# Altium PCB Energy_Monitor.PcbDoc
Units mil, origin at the board's own origin, x right, y up, seen from the top; angles counter-clockwise.
Board outline 4800 x 3400 mil, 2 copper layers (Top Layer, Bottom Layer); 83 components, 55 nets, 258 pads, 67 vias.
Unrouted connection lines stored in the file: 18.
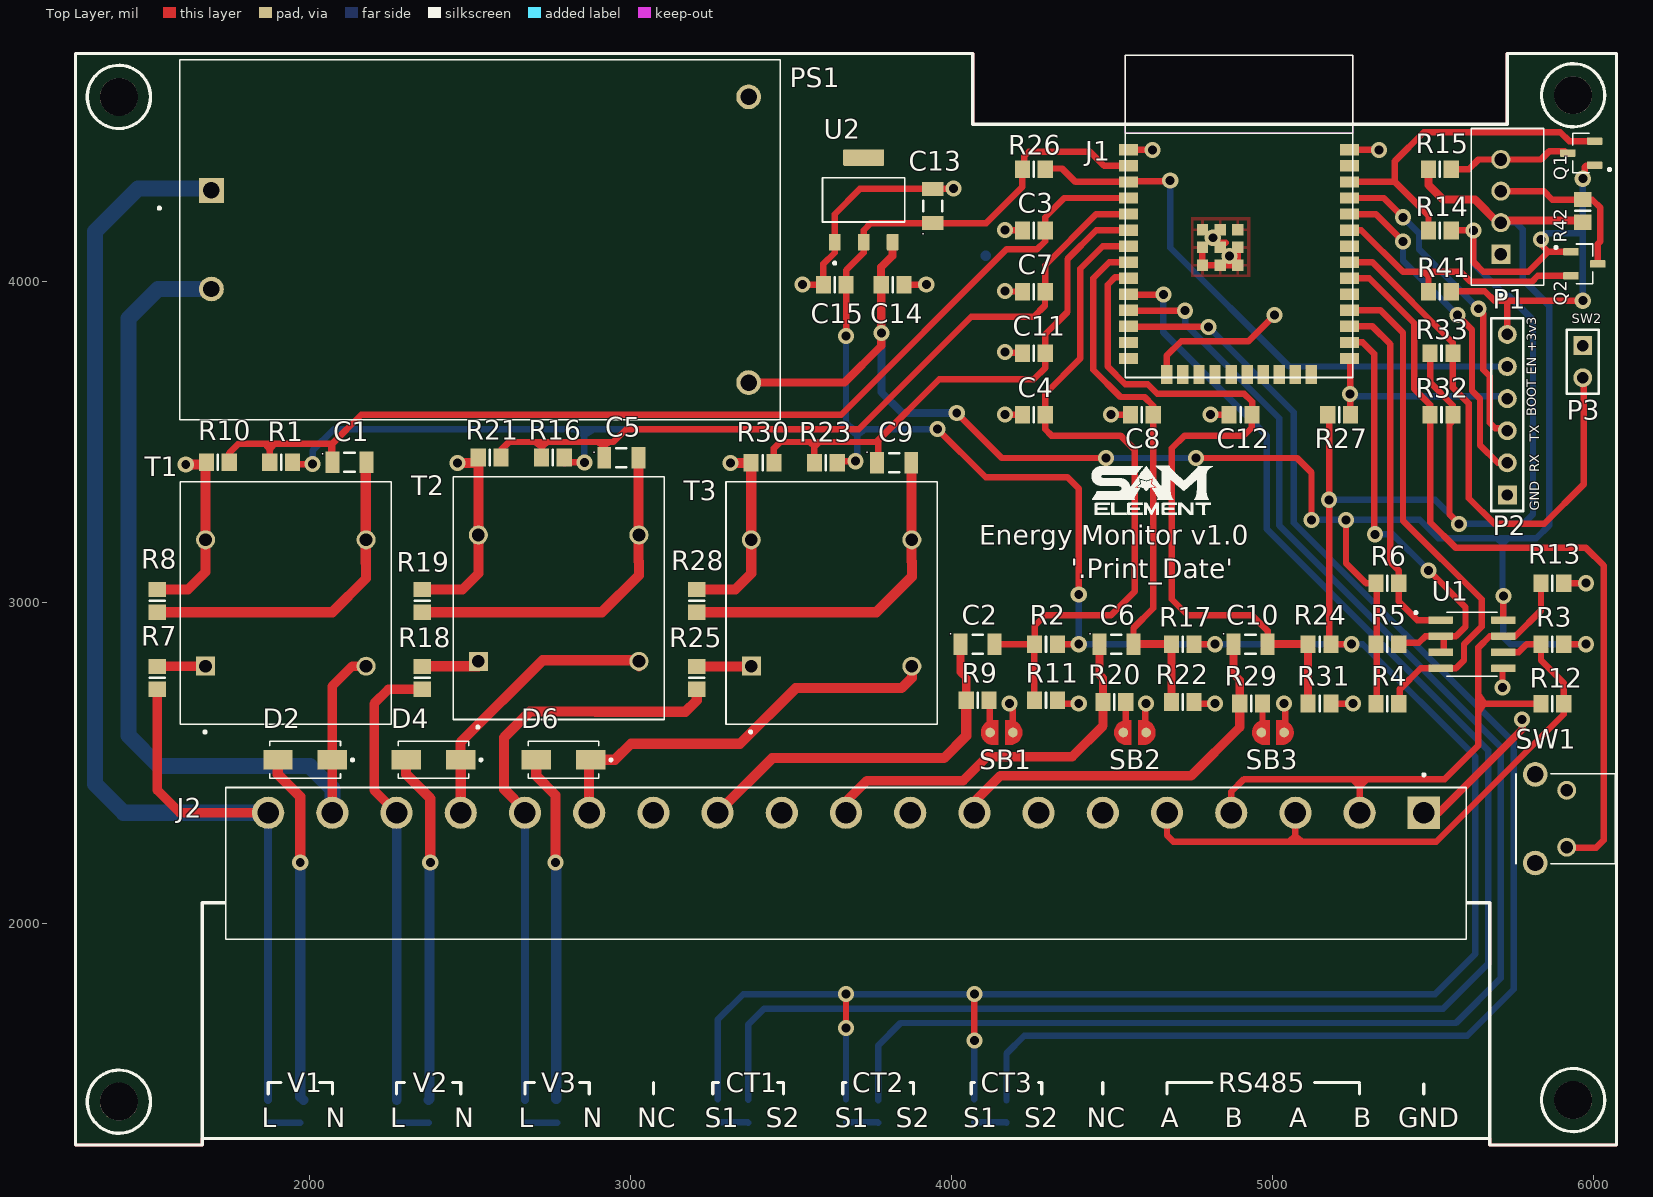
[diagram p0: Top Layer view]
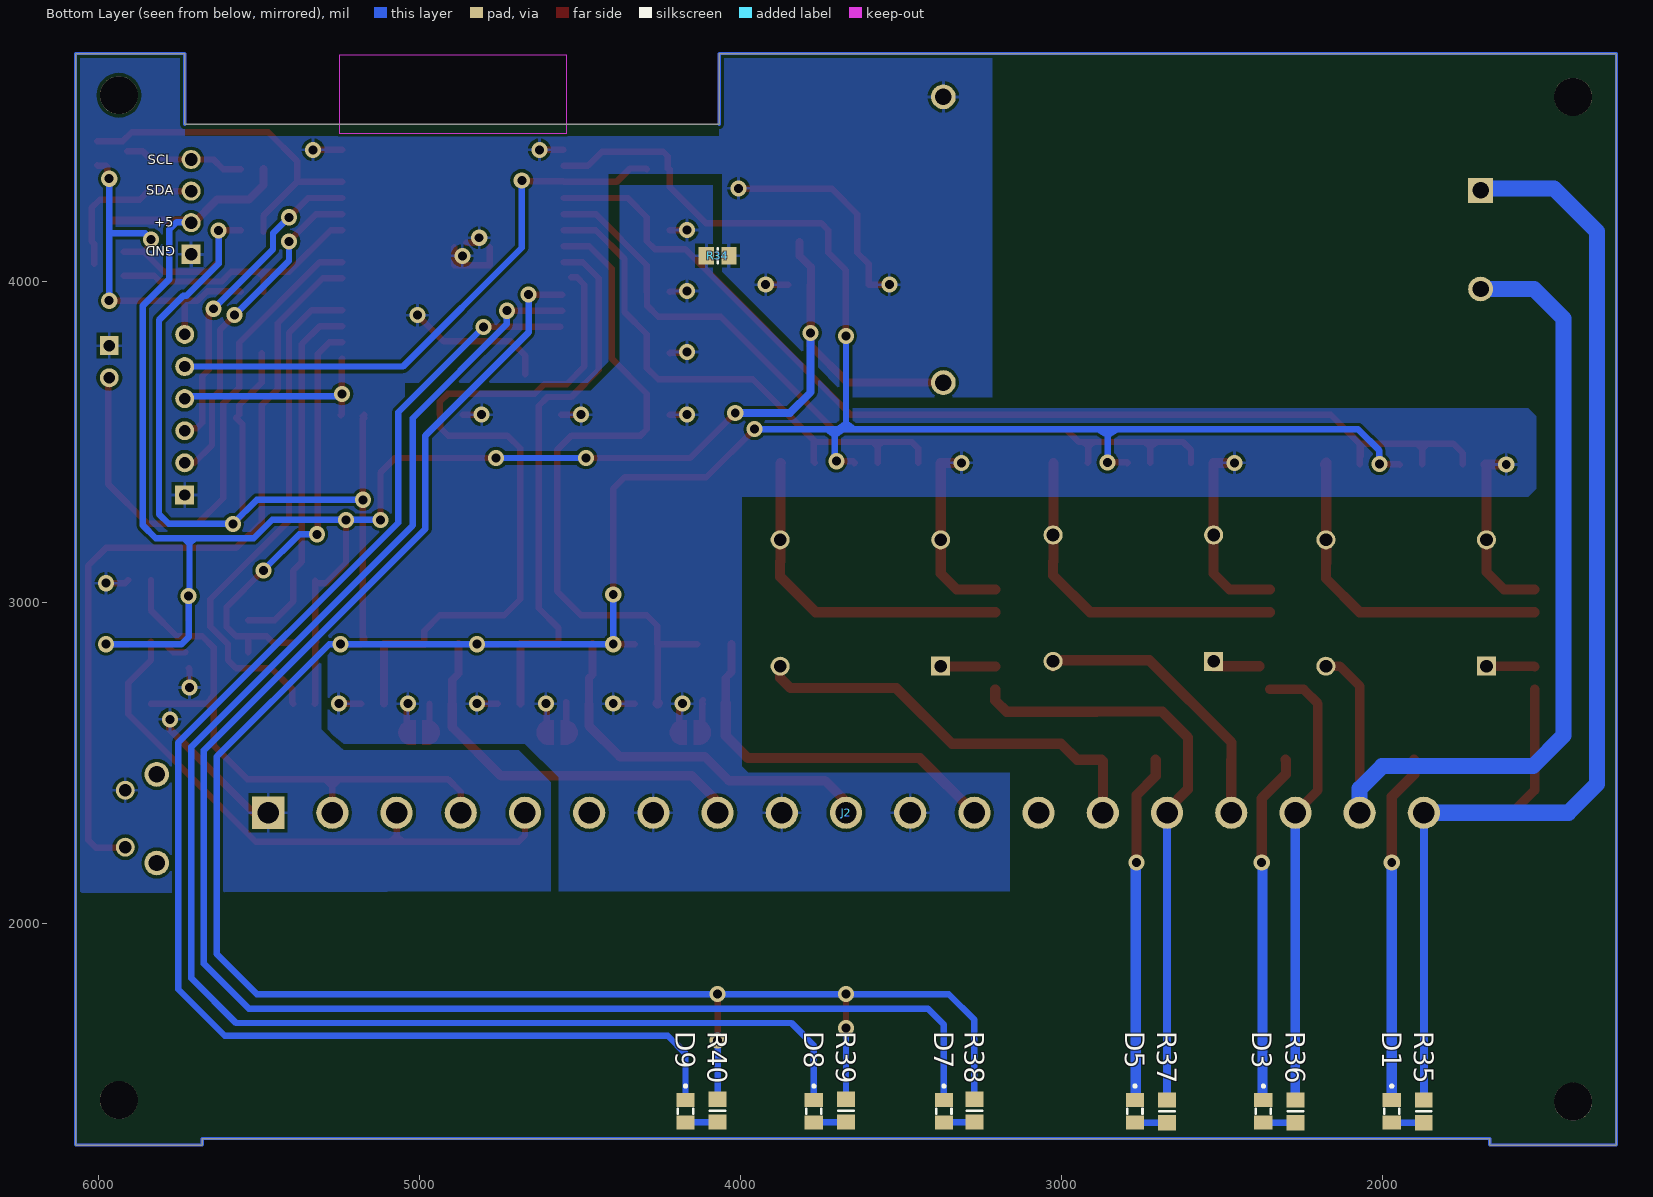
[diagram p1: Bottom Layer view, seen from below]

## Layer stack, top to bottom
Top Solder: solder mask 0.4, Solder Resist, Dk 3.5
Top Layer: signal copper 1.4
Dielectric 1: dielectric 12.6, FR-4, Dk 4.8
Bottom Layer: signal copper 1.4
Bottom Solder: solder mask 0.4, Solder Resist, Dk 3.5

## Board outline
1665,1310 1665,1330 5675,1330 5675,1310 6070,1310 6070,4710 5730,4710 5730,4490 4065,4490 4065,4710 1270,4710 1270,1310

## Design rules (kind name [scope] priority, off if disabled: settings)
Clearance [All] p1: gap=10 ignorepadtopadclearanceinfootprint=FALSE except(0: Arc-Hole Track-Hole SMDPad-Hole THPad-Hole Via-Hole Fill-Hole Poly-Hole Region-Hole Text-Hole)
PolygonConnect [All] p1: connectstyle=Relief reliefconductorwidth=10 reliefentries=4 polygonreliefangle="90 Angle" airgapwidth=10
RoutingVias [All] p1: holewidth=28 width=50 viastyle="Through Hole" minholewidth=28 minwidth=50 maxholewidth=28 maxwidth=50
SolderMaskExpansion [All] p1: expansion=4
Width [All] p1: maxlimit=100 minlimit=5 preferedwidth=23.62 minimp=50.000000 maximp=50.000000 favimp=50.000000
30 further rules are at their usual default settings.

## Components (designator, comment, footprint, x,y, rotation, side; value= is the part's Value field where it differs from the comment)
C1 "C Tantalum 10u" C1206 2123.31,3436.52 r0 top value=10uF
C2 "C Tantalum 10u" C1206 4080,2870 r180 top value=10uF
C3 "C 100n" 6-0805_N 4255,4158.75 r0 top value=100n
C4 "C 100n" 6-0805_N 4255,3585 r0 top value=100n
C5 "C Tantalum 10u" C1206 2970,3451.52 r0 top value=10uF
C6 "C Tantalum 10u" C1206 4512.3,2870 r180 top value=10uF
C7 "C 100n" 6-0805_N 4255,3967.5 r0 top value=100n
C8 "C 100n" 6-0805_N 4591.79,3585 r0 top value=100n
C9 "C Tantalum 10u" C1206 3820,3435 r0 top value=10uF
C10 "C Tantalum 10u" C1206 4930,2870 r180 top value=10uF
C11 "C 100n" 6-0805_N 4255,3776.25 r0 top value=100n
C12 "C 100n" 6-0805_N 4898.94,3585 r0 top value=100n
C13 "C Tantalum 10u" C1206 3940,4235 r90 top value=10uF
C14 "C 100n" 6-0805_N 3815,3990 r180 top value=100n
C15 "C 100n" 6-0805_N 3635,3990 r0 top value=100n
D1 "LED 0805" LEDC2012X70N 1970,1415 r270 bottom
D2 "1N4007" DIOM5227X270N 1985,2510 r180 top
D3 "LED 0805" LEDC2012X70N 2370,1415 r270 bottom
D4 "1N4007" DIOM5227X270N 2385,2510 r180 top
D5 "LED 0805" LEDC2012X70N 2770,1415 r270 bottom
D6 "1N4007" DIOM5227X270N 2790,2510 r180 top
D7 "LED 0805" LEDC2012X70N 3365,1415 r270 bottom
D8 "LED 0805" LEDC2012X70N 3770,1415 r270 bottom
D9 "LED 0805" LEDC2012X70N 4170,1415 r270 bottom
J1 "ESP32-WROOM-32E" ESP32-WROOM-32E 4894.49,4085 r0 top
J2 "Terminal Block Right angle 19Pin" CUI_TBP01R1-508-19BE 5470,2345 r180 bottom
P1 "Header 4" JST_B4B-XH-A(LF)(SN) 5730.67,4232.36 r270 top
P2 "Header 6" HDR1X6 5730,3335 r90 top
P3 "Header 2" HDR1X2 5965,3800 r270 top
PS1 "HLK-10M05" CONV_HLK-10M05 2530,4130 r0 top
Q1 "BSS138" SOT95P240X111-3N 5960,4400 r180 top
Q2 "BSS138" SOT95P240X111-3N 5970,4055 r0 top
R1 "R 200K" 6-0805_N 1910.43,3436.52 r0 top value=200K
R2 "R 200K" 6-0805_N 4293,2870 r0 top value=200K
R3 "R 10K" 6-0805_N 5870.43,2870 r0 top value=10K
R4 "R 10K" 6-0805_N 5356.25,2685 r180 top value=10K
R5 "R 10K" 6-0805_N 5356.25,2870 r180 top value=10K
R6 "R 10K" 6-0805_N 5356.25,3060 r180 top value=10K
R7 "R 200K" 6-0805_N 1525,2765 r90 top value=200K
R8 "R 500" 6-0805_N 1525,3005 r270 top value=500
R9 "R 22" 6-0805_N 4080,2695.13 r180 top value=22
R10 "R 200K" 6-0805_N 1713.31,3436.52 r0 top value=200K
R11 "R 200K" 6-0805_N 4293,2695.13 r180 top value=200K
R12 "R 120" 6-0805_N 5870.43,2685 r0 top value=120
R13 "R 10K" 6-0805_N 5870.43,3060 r180 top value=10K
R14 "R 10K" 6-0805_N 5520,4158.75 r0 top value=10K
R15 "R 10K" 6-0805_N 5520,4350 r180 top value=10K
R16 "R 200K" 6-0805_N 2757.13,3451.52 r0 top value=200K
R17 "R 200K" 6-0805_N 4719,2870 r0 top value=200K
R18 "R 200K" 6-0805_N 2350,2765 r90 top value=200K
R19 "R 500" 6-0805_N 2350,3005 r270 top value=500
R20 "R 22" 6-0805_N 4506,2690.13 r180 top value=22
R21 "R 200K" 6-0805_N 2560,3451.52 r0 top value=200K
R22 "R 200K" 6-0805_N 4719,2690.13 r180 top value=200K
R23 "R 200K" 6-0805_N 3607.13,3435 r0 top value=200K
R24 "R 200K" 6-0805_N 5145,2870 r0 top value=200K
R25 "R 200K" 6-0805_N 3205,2765 r90 top value=200K
R26 "R 10K" 6-0805_N 4255,4350 r180 top value=10K
R27 "R 10K" 6-0805_N 5206.09,3585 r180 top value=10K
R28 "R 500" 6-0805_N 3205,3005 r270 top value=500
R29 "R 22" 6-0805_N 4932,2685.13 r180 top value=22
R30 "R 200K" 6-0805_N 3410,3435 r0 top value=200K
R31 "R 200K" 6-0805_N 5145,2685.13 r180 top value=200K
R32 "R 10K" 6-0805_N 5525,3585 r0 top value=10K
R33 "R 10K" 6-0805_N 5525,3776.25 r180 top value=10K
R34 "R 0" 6-0805_N 4070,4080 r0 bottom value=0
R35 "R 200K" 6-0805_N 1870,1415 r270 bottom value=200K
R36 "R 200K" 6-0805_N 2270,1415 r270 bottom value=200K
R37 "R 200K" 6-0805_N 2670,1415 r270 bottom value=200K
R38 "R 500" 6-0805_N 3270,1416.97 r270 bottom value=500
R39 "R 500" 6-0805_N 3670,1416.97 r270 bottom value=500
R40 "R 500" 6-0805_N 4070,1416.97 r270 bottom value=500
R41 "R 10K" 6-0805_N 5520,3967.5 r0 top value=10K
R42 "R 10K" 6-0805_N 5965,4220 r270 top value=10K
SB1 "solder Bridge" "Solder Bridge"#1 4145,2595 r0 top
SB2 "solder Bridge" "Solder Bridge"#1 4560,2595 r0 top
SB3 "solder Bridge" "Solder Bridge"#2 4990,2595 r0 top
SW1 "Tactile Switch Right Angle" SW_1825027-5 5915,2326.42 r90 top
T1 "ZMPT101B" XFMR_ZMPT101B 1925,2998.36 r90 top
T2 "ZMPT101B" XFMR_ZMPT101B 2775,3013.36 r90 top
T3 "ZMPT101B" XFMR_ZMPT101B 3625,2998.36 r90 top
U1 "MAX485ESA+T" SOIC127P600X175-8N 5620,2870 r0 top
U2 "AMS1117-3.3" SOT229P700X180-4N 3725,4254.1 r90 top

## Footprints (in the part's own frame and the unit in brackets; to place one, negate y for a bottom-side part, rotate by r counter-clockwise, add the part's x,y. Pads: shape width x height; smd on the part's side, far side on the other; paste and mask are expansions set on the pad)
6-0805_N [mm] "Chip Resistor, Body 2.0x1.2mm, IPC Medium Density"
  rect 1.2x1.4 smd: 1(-0.9,0) 2(0.9,0)
  silkscreen extent 0,-0.6 0,0.6, body extent -1.07,-0.7 1.07,0.7, height 0.7
C1206 [mm] "Chip Capacitor, Body 3.2x1.6mm, IPC High Density"
  rect 1.1x1.7 smd: 1(-1.35,0) 2(1.35,0)
  silkscreen extent -0.4,-0.75 0.4,0.75, body extent -1.7,-0.9 1.7,0.9, height 1.3
CONV_HLK-10M05 [mm]
  rect 1.95x1.95 / inner round 1.95 / far side rect 1.95x1.95 hole 1.3: 1(-21.25,3.9)
  round 1.95 hole 1.3: 2(-21.25,-3.9) 3(21.25,11.3) 4(21.25,-11.3)
  silkscreen extent -25.47,-14.25 23.75,14.25, body extent -23.75,-14.25 23.75,14.25, height 22
CUI_TBP01R1-508-19BE [mm]
  rect 2.55x2.55 / inner round 2.55 / far side rect 2.55x2.55 hole 1.7: 1(0,0)
  round 2.55 hole 1.7: 2(5.08,0) 3(10.16,0) 4(15.24,0) 5(20.32,0) 6(25.4,0) 7(30.48,0) 8(35.56,0) 9(40.64,0) 10(45.72,0) 11(50.8,0) 12(55.88,0) 13(60.96,0) 14(66.04,0) 15(71.12,0) 16(76.2,0) 17(81.28,0) 18(86.36,0) 19(91.44,0)
DIOM5227X270N [mm]
  rect 2.33x1.56 smd: A(2.14,0) C(-2.14,0)
  silkscreen extent -3.85,-1.48 2.8,1.48, body extent -2.52,-1.14 2.53,1.03, height 2.45
ESP32-WROOM-32E [mm]
  rect 1.5x0.9 smd: 1(-8.75,8.255) 2(-8.75,6.985) 3(-8.75,5.715) 4(-8.75,4.445) 5(-8.75,3.175) 6(-8.75,1.905) 7(-8.75,0.635) 8(-8.75,-0.635) 9(-8.75,-1.905) 10(-8.75,-3.175) 11(-8.75,-4.445) 12(-8.75,-5.715) 13(-8.75,-6.985) 14(-8.75,-8.255) 25(8.75,-8.255) 26(8.75,-6.985) 27(8.75,-5.715) 28(8.75,-4.445) 29(8.75,-3.175) 30(8.75,-1.905) 31(8.75,-0.635) 32(8.75,0.635) 33(8.75,1.905) 34(8.75,3.175) 35(8.75,4.445) 36(8.75,5.715) 37(8.75,6.985) 38(8.75,8.255)
  rect 0.9x1.5 smd: 15(-5.715,-9.505) 16(-4.445,-9.505) 17(-3.175,-9.505) 18(-1.905,-9.505) 19(-0.635,-9.505) 20(0.635,-9.505) 21(1.905,-9.505) 22(3.175,-9.505) 23(4.445,-9.505) 24(5.715,-9.505)
  rect 0.9x0.9 smd: GND@39(-2.9,1.935) GND@40(-1.5,1.935) GND@41(-0.1,1.935) GND@42(-2.9,0.535) GND@43(-1.5,0.535) GND@44(-0.1,0.535) GND@45(-2.9,-0.865) GND@46(-1.5,-0.865) GND@47(-0.1,-0.865)
  Keep-Out Layer region: 9,9.555 -9,9.555 -9,15.745 9,15.745
  silkscreen extent -9,-9.75 9,15.75, body extent -9,-9.83 9,15.67, height 3.25
HDR1X2 [mm] "Connector; Header; 2 Position"
  rect 1.5x1.5 hole 0.9: 1(0,0)
  round 1.5 hole 0.9: 2(2.54,0)
  silkscreen extent -1.27,-1.27 3.81,1.27
HDR1X6 [mm] "Connector; Header; 6 Position"
  rect 1.5x1.5 hole 0.9: 1(0,0)
  round 1.5 hole 0.9: 2(2.54,0) 3(5.08,0) 4(7.62,0) 5(10.16,0) 6(12.7,0)
  silkscreen extent -1.27,-1.27 13.97,1.27
JST_B4B-XH-A(LF)(SN) [mm]
  rect 1.508x1.508 / inner round 1.508 / far side rect 1.508x1.508 hole 1: 1(3.75,-0.525)
  round 1.508 hole 1: 2(1.25,-0.525) 3(-1.25,-0.525) 4(-3.75,-0.525)
  silkscreen extent -6.2,-2.88 7.1,2.88, body extent -6.2,-2.88 6.2,2.88, height 7
LEDC2012X70N [mm]
  rect 1.1x1.45 smd: A(0.9,0) C(-0.9,0)
  silkscreen extent -2.1,-0.6 0.2,0.6, body extent -1,-0.62 1,0.62, height 0.7
SOIC127P600X175-8N [mm]
  rrect25% 1.97x0.59 smd: 1(-2.475,1.905) 2(-2.475,0.635) 3(-2.475,-0.635) 4(-2.475,-1.905) 5(2.475,-1.905) 6(2.475,-0.635) 7(2.475,0.635) 8(2.475,1.905)
  silkscreen extent -4.54,-2.52 2,2.59, body extent -3,-2.45 3,2.45, height 1.75
"Solder Bridge"#1 [mil]
  round 30 smd: 1(-26,0) 2(45,0)
  Top Layer region: 39.37,39.37 19.69,39.37 19.69,-39.37 39.37,-39.37
  Top Layer region: 59.06,19.68 39.37,19.68 39.37,-19.68 59.06,-19.68
  Top Layer region: -39.37,-19.68 -19.69,-19.68 -19.69,19.68 -39.37,19.68
  Top Layer region: -19.69,-39.37 0,-39.37 0,39.37 -19.69,39.37
  Top Layer lines w39.37: -19.61,-19.3 cw(c-15.75,0) -27.78,15.58 cw(c-15.75,0) -19.61,19.3 ; 39.29,-19.3 ccw(c35.43,0) 45,17.2 ccw(c35.43,0) 39.29,19.3
"Solder Bridge"#2 [mil]
  round 30 smd: 1(-26,0) 2(45,0)
  Top Layer region: 39.37,39.37 19.69,39.37 19.69,-39.37 39.37,-39.37
  Top Layer region: 59.06,19.68 39.37,19.68 39.37,-19.68 59.06,-19.68
  Top Layer region: -39.37,-19.68 -19.69,-19.68 -19.69,19.68 -39.37,19.68
  Top Layer region: -19.69,-39.37 0,-39.37 0,39.37 -19.69,39.37
  Top Layer lines w39.37: -19.61,-19.3 cw(c-15.75,0) -35.43,0 cw(c-15.75,0) -27.57,15.74 cw(c-15.75,0) -19.61,19.3 ; 39.29,-19.3 ccw(c35.43,0) 43.09,18.14 ccw(c35.43,0) 39.29,19.3
SOT95P240X111-3N [mm]
  rrect25% 1.23x0.6 smd: 1(-1.06,0.95) 2(-1.06,-0.95) 3(1.06,0)
  silkscreen extent -2.35,-1.57 0.65,1.57, body extent -1.2,-1.46 1.2,1.46, height 0.65
SOT229P700X180-4N [mm]
  rrect15% 1.31x0.93 smd: 1(-3.345,2.29) 2(-3.345,0) 3(-3.345,-2.29)
  rrect15% 1.31x3.24 smd: 4(3.345,0)
  silkscreen extent -5.1,-3.25 1.75,3.25, body extent -3.5,-3.25 3.5,3.25, height 1.8
SW_1825027-5 [mm]
  round 1.498 hole 0.99: 1(-2.25,0) 2(2.25,0)
  round 1.95 hole 1.3: S1(-3.505,2.49) S2(3.505,2.49)
  silkscreen extent -3.55,-3.86 3.55,4.01
XFMR_ZMPT101B [mm]
  rect 1.508x1.508 / inner round 1.508 / far side rect 1.508x1.508 hole 1: 1(-5,6.35)
  round 1.508 hole 1: 2(-5,-6.35) 3(5,-6.35) 4(5,6.35)
  silkscreen extent -10.3,-8.35 9.6,8.35, body extent -9.6,-8.35 9.6,8.35, height 18.8

## Part data
C1 C2 C5 C6 C9 C10 C13: library part "Cap Pol1", "Polarized Capacitor (Radial)", LatestRevisionDate=17-Jul-2002, LatestRevisionNote="Re-released for DXP Platform.", PackageDescription="Polarized Capacitor (Radial); 2 Leads", PackageReference=RB7.6-15, Published=8-Jun-2000, Publisher="Altium Limited"
C3 C4 C7 C8 C11 C12 C14 C15: library part Cap, "Capacitor", LatestRevisionDate=17-Jul-2002, LatestRevisionNote="Re-released for DXP Platform.", PackageDescription="Radial Cap, Thru-Hole; 2 Leads; 0.3 in Pin Spacing", PackageReference=RAD-0.3, Published=8-Jun-2000, Publisher="Altium Limited"
D1 D3 D5 D7 D8 D9: library part 597-3305-607F, "LED Uni-Color Green 4-Pin Chip 0805 T/R", Package=None, Availability=Unavailable, MP=597-3305-607F, Price=None
D2 D4 D6: library part S1M, "Diode Standard 1000 V 1A Surface Mount DO-214AC (SMA)", Package="DO-214AC-2 Diotec", Availability="In Stock", Check_prices=https://www.snapeda.com/parts/S1M/Diotec/view-part/?ref=eda, MF="Diotec Semiconductor", MP=S1M, Price=None, Purchase-URL=https://pricing.snapeda.com/search/part/S1M/?ref=eda, SnapEDA_Link=https://www.snapeda.com/parts/S1M/Diotec/view-part/?ref=snap
J1: Package="SMD-44 Espressif Systems", Availability="In Stock", Check_prices=https://www.snapeda.com/parts/ESP32-WROOM-32E/Espressif+Systems/view-part/?ref=eda, MF="Espressif Systems", MP=ESP32-WROOM-32E, Price=None, SnapEDA_Link=https://www.snapeda.com/parts/ESP32-WROOM-32E/Espressif+Systems/view-part/?ref=snap
J2: library part TBP01R1-508-19BE, Package=None, Availability=Unavailable, MP=TBP01R1-508-19BE, Price=None
P1: "Header, 4-Pin", LatestRevisionDate=17-Jul-2002, LatestRevisionNote="Re-released for DXP Platform.", Publisher="Altium Limited"
P2: "Header, 6-Pin", LatestRevisionDate=17-Jul-2002, LatestRevisionNote="Re-released for DXP Platform.", Publisher="Altium Limited"
P3: "Header, 2-Pin", LatestRevisionDate=17-Jul-2002, LatestRevisionNote="Re-released for DXP Platform.", Publisher="Altium Limited"
PS1: "10W Ultra-Compact Power Module", Package=Package, Check_prices=https://www.snapeda.com/parts/HLK-10M05/Hi-link/view-part/?ref=eda, MF=Hi-link, MP=HLK-10M05, SnapEDA_Link=https://www.snapeda.com/parts/HLK-10M05/Hi-link/view-part/?ref=snap
Q1 Q2: "N-Channel 50V 220mA (Ta) 360mW (Ta) Surface Mount SOT-23-3", Package="SOT-23 ON Semiconductor", Availability=Good, Check_prices=https://www.snapeda.com/parts/BSS138/ON%20Semiconductor/view-part/4794929/?ref=eda, MF="ON Semiconductor", MP=BSS138, Price=None, Purchase-URL=https://pricing.snapeda.com/search/part/BSS138/?ref=eda, SnapEDA_Link=https://www.snapeda.com/parts/BSS138/ON%20Semiconductor/view-part/4794929/?ref=snap
R1 R2 R3 R4 R5 R6 R7 R8 R9 R10 R11 R12 R13 R14 R15 R16 R17 R18 R19 R20 R21 R22 R23 R24 R25 R26 R27 R28 R29 R30 R31 R32 R33 R34 R35 R36 R37 R38 R39 R40 R41 R42: library part Res1, "Resistor", LatestRevisionDate=17-Jul-2002, LatestRevisionNote="Re-released for DXP Platform.", PackageDescription="Axial Device, Thru-Hole; 2 Leads; 0.3 in Pin Spacing", PackageReference=AXIAL-0.3, Published=8-Jun-2000, Publisher="Altium Limited"
SW1: library part 1825027-5, "Switch Tactile OFF (ON) SPST Round Button PC Pins 0.05A 24VDC 1.57N Thru-Hole Loose Piece", Package=None, Check_prices=https://www.snapeda.com/parts/1825027-5/TE+Connectivity+ALCOSWITCH+Switches/view-part/?ref=eda, Digi-Key_Part_Number=450-1662-ND, EU_RoHS_Compliance=Compliant, MF="TE Connectivity", MP=1825027-5, Purchase-URL=https://pricing.snapeda.com/search/part/1825027-5/?ref=eda, SnapEDA_Link=https://www.snapeda.com/parts/1825027-5/TE+Connectivity+ALCOSWITCH+Switches/view-part/?ref=snap
T1 T2 T3: "Current-type Voltage Transformer", Package=None, Availability="Not in stock", Check_prices=https://www.snapeda.com/parts/ZMPT101B/Qingxian+Zeming+Langxi+Electronic/view-part/?ref=eda, MF="Qingxian Zeming Langxi Electronic", MP=ZMPT101B, Price=None, SnapEDA_Link=https://www.snapeda.com/parts/ZMPT101B/Qingxian+Zeming+Langxi+Electronic/view-part/?ref=snap
U1: "1/1 Transceiver Half RS422, RS485 8-SOIC", Package="SOIC-8 Maxim", Availability="In Stock", Check_prices=https://www.snapeda.com/parts/MAX485ESA/Maxim+Integrated/view-part/?ref=eda, MF="Maxim Integrated", MP=MAX485ESA, Price=None, Purchase-URL=https://pricing.snapeda.com/search/part/MAX485ESA/?ref=eda, SnapEDA_Link=https://www.snapeda.com/parts/MAX485ESA/Maxim+Integrated/view-part/?ref=snap
U2: "Sot223/Pkg 1-Amp 3.3-Volt Low Drop Out Voltage Regulatator", Package="SOT-223 Seeed Technology", Availability="Not in stock", Check_prices=https://www.snapeda.com/parts/AMS1117-3.3/Advanced+Monolithic+Systems/view-part/?ref=eda, MF="Advanced Monolithic Systems", MP=AMS1117-3.3, Price=None, SnapEDA_Link=https://www.snapeda.com/parts/AMS1117-3.3/Advanced+Monolithic+Systems/view-part/?ref=snap

## Free pads (board coordinates)
  round 118.11 hole 118.11: 2(1405,1445) 2(1405,4575) 2(5935,1450) 2(5935,4580)

## Via types
v1: diameter 50, hole 28, Top Layer to Bottom Layer, 67 vias

## Nets (pads, with @x,y where several pads share a name; then routed paths per layer and width w, separated by ;. In a path a pad name is that pad's centre, name@x,y a point inside that pad or via, vN(x,y) a via of type N, cw(c..) or ccw(c..) an arc to the next point about the centre after c; other vN are vias at no path point)
485_EN: J1.26 R5.1 U1.2 U1.3 | length 1373.3
  Top Layer w20: J1.26 5280,3810 5315,3775 5315,3215 v1(5317.5,3212.5) ; R5.1@5388.34,2874.16 5454.16,2874.16 5475,2895 U1.2 U1.2@5532.56,2895 ; v1(5485,3100) 5599.72,2985.28 5599.72,2924.72 5570,2895 U1.2@5532.56,2895 ; U1.3@5532.56,2845 U1.2@5532.56,2895
  Bottom Layer w20: v1(5317.5,3212.5) 5372.5,3212.5 v1(5485,3100)
+3V3: C13.1 C15.2 J1.2 P2.6 Q1.1 Q2.1 R1.2 R2.2 R14.2 R16.2 R17.2 R23.2 R24.2 R26.2 R27.2 R32.2 R33.2 R38.1 R39.1 R40.1 R41.2 U2.2 | length 15229.7
  Top Layer w20: R1.2@1944.59,3428.72 1946.4,3430.53 2007.78,3430.53 v1(2008.31,3431.06) v1@2008.31,3427.12 ; R16.2@2793.78,3433.78 2792.56,3435 2795.06,3437.5 2853.56,3437.5 v1(2855,3436.06) ; R23.2@3643.78,3433.78 R23.2 3647.56,3440 v1(3700,3440) ; v1(3670,1675) v1(3670,1780) ; v1(3670,3830) 3670.22,3830.22 3670.22,3989.78 C15.2 3670.43,4035.43 3725,4090 U2.2 3725,4160 3746.85,4181.85 C13.1 4106.85,4181.85 4219.57,4294.57 R26.2 ; v1(3955,3540) 4105,3390 4360,3390 4395,3355 v1(4395,3025) ; v1(4070,1635) v1(4070,1780) ; R26.2@4225,4351.49 4225,4390 4238.82,4403.82 4430,4403.82 4473.82,4360 J1.2 ; R2.2 v1(4395,2870) ; R17.2 v1(4820,2870) ; R27.2 5175,3580.65 5170,3575.65 5175,3570.65 5175,3370 v1(5175,3320) 5175,2895.43 5170,2890.43 5175,2885.43 5170,2880.43 R24.2 v1(5245,2870) ; R33.2 5490,3775.82 5490,3685 5560.43,3614.57 R32.2 5570,3575.43 5550,3555.43 5550,3275 v1(5580,3245) ; R41.2@5555,3967.93 R41.2 5557.93,3970 5660,3970 5690,3940 5730,3940 ; R14.2 5555.75,4159.06 5624.06,4159.06 v1(5624.37,4159.37) 5624.37,4060.63 5655,4030 5795.2,4030 5857.6,4092.4 ; P2.6 5730,3940 ; v1(5834.31,4131.03) 5835.74,4129.59 5835.74,4114.26 5857.6,4092.4 ; Q2.1@5919.42,4092.4 5857.6,4092.4 ; v1(5965,3940) 5730,3940 ; v1(5965,4320) 5963.37,4321.63 5970.74,4329.01 5970.74,4356.45 5975.08,4360.79 5999.92,4360.79 Q1.1
  Bottom Layer w20: v1(2008.31,3431.06) 2008.31,3473.31 2075,3540 2855,3540 ; v1@2851.06,3436.06 v1(2855,3436.06) 2855,3540 ; R38.1 3270,1700 3350,1780 5505,1780 5630,1905 5630,2520 5280,2870 v1(5245,2870) v1(4820,2870) v1(4395,2870) v1(4395,3025) ; R39.1 v1(3670,1675) ; v1(3670,3830) 3670,3540 2855,3540 ; 3675,3540 3710,3540 ; v1@3705,3440 3705,3535 3710,3540 ; v1@3955,3542.5 v1(3955,3540) 3710,3540 ; R40.1 v1(4070,1635) ; v1(5175,3320) 5505,3320 v1(5580,3245) 5780,3245 5810,3275 5810,3880 5735,3955 5725,3955 5624.37,4055.63 v1(5624.37,4159.37) ; v1(5834.31,4131.03) 5853.28,4150 5965,4150 ; v1(5965,3940) 5965,4150 ; v1(5965,4320) 5965,4150
+5: C14.2 P1.2 PS1.4 R3.2 R4.2 R5.2 R6.2 R15.2 R42.2 U1.8 U2.3 | length 6307.4
  Top Layer w20: C14.2 C14.2@3779.78,3989.78 ; v1(4015,3590) 4155,3450 4470,3450 v1@4480,3460 ; v1(4760,3450) 5075,3450 5120,3405 v1@5120,3265 ; v1(5227.5,3257.5) 5227.5,3122.5 5290,3060 R6.2 ; R6.2@5322.69,3068.12 5322.69,2879.37 5320.82,2877.5 5322.69,2875.62 5322.69,2686.88 R4.2@5324.57,2685 ; U1.8 5717.5,2945.06 v1(5717.5,3020) ; R3.2 v1(5975,2870)
  Top Layer w25: PS1.4@3366.61,3685 3665,3685 3779.78,3799.78 C14.2@3779.78,3989.78 ; C14.2 3779.57,4044.57 3815,4080 3815,4122.25 U2.3 ; R15.2 5484.57,4300.43 5530,4255 5628.85,4255 5700.7,4183.15 P1.2 5716.42,4189.57 R42.2@5955,4189.57
  Bottom Layer w20: v1@4480,3460 4490,3450 v1(4760,3450) ; v1@5120,3265 5127.5,3257.5 v1(5227.5,3257.5) 5457.5,3257.5 5515,3200 5715,3200 ; P1.2@5725,4185 5755,4185 5777.5,4162.5 5777.5,4007.5 5860,3925 5860,3240 5820,3200 5715,3200 ; v1(5975,2870) 5740,2870 5717.5,2892.5 v1(5717.5,3020) 5715,3022.5 5715,3200
  Bottom Layer w25: v1(3780,3840) 3780,3655 3845,3590 v1(4015,3590)
  other v1: 5120,3257.5 4480,3450
ADC_CT1: C2.1 C4.2 J1.7 R2.1 R11.2 | length 2193.3
  Top Layer w20: C2.1 4254.57,2870 4256.07,2868.5 R11.2@4256.07,2686.5 ; R2.1 4257.57,2927.57 4290.43,2960.43 4495.43,2960.43 4570,3035 4570,3475 4525,3520 4310,3520 4290.43,3539.57 C4.2 4290.43,3650.43 4400,3760 4400,4040 4470,4110 J1.7
  Top Layer w31.5: R11.2@4256.07,2686.5 R11.2@4257.57,2685
ADC_CT2: C6.1 C8.2 J1.8 R17.1 R22.2 | length 1720.9
  Top Layer w20: J1.8 4490,4060 4440,4010 4440,3725 4525,3640 4600,3640 4627.22,3612.78 C8.2 4627.22,2982.22 4565.45,2920.45 C6.1
  Top Layer w25: C6.1 R17.1 R22.2 R22.2@4683.57,2685
ADC_CT3: C10.1 C12.2 J1.9 R24.1 R31.2 | length 2320
  Top Layer w20: J1.9@4525.62,4013.75 4508.75,4013.75 4485,3990 4485,3735 4540,3680 4610,3680 4640,3650 4910,3650 4935,3625 4935,3585.63 C12.2 4934.37,3544.37 4909.37,3519.37 4724.37,3519.37 4685,3480 4685,3010 4735,2960 4935,2960 4983.15,2911.85 C10.1
  Top Layer w25: C10.1 R24.1 R31.2 R31.2@5109.57,2685
ADC_V1: C1.1 C3.2 J1.4 R1.1 R10.2 | length 3381.1
  Top Layer w20: R10.2@1748.74,3430 R10.2 1748.74,3465.43 1778.31,3495 1875,3495 ; R1.1@1875,3430 R1.1 1875,3495 ; C1.1@2066.85,3455 2066.85,3491.69 2070.16,3495 ; C1.1@2070.16,3430 C1.1 2070.16,3495 ; J1.4 4350,4260 4290.43,4200.43 C3.2 4290.43,4125.43 4265,4100 4170,4100 3655,3585 2160.16,3585 2070.16,3495 ; 1875,3495 2070.16,3495
ADC_V2: C5.1 C7.2 J1.5 R16.1 R21.2 | length 2492.2
  Top Layer w20: R21.2@2595.43,3435 R21.2 2595.43,3475.43 2620,3500 2720,3500 ; R16.1@2721.69,3435 R16.1 2721.69,3498.31 2720,3500 ; 2915,3488.28 2915,3436.85 C5.1@2916.85,3435 ; J1.5 4450,4210 4290.43,4050.43 C7.2 4290,3967.07 4290,3925 4255,3890 4060,3890 3710,3540 2985,3540 2945,3500 2720,3500
ADC_V3: C9.1 C11.2 J1.6 R23.1 R30.2 | length 1719.3
  Top Layer w20: R30.2 3445.43,3480.43 3465,3500 3770,3500 3770,3438.15 C9.1 ; R23.1 3571.69,3493.31 ; 3765,3500 3960,3695 4255,3695 4290.43,3730.43 C11.2 4290.43,3835.43 4360,3905 4360,4070 4450,4160 J1.6
AGND: C3.1 C4.1 C7.1 C8.1 C11.1 C12.1 J2.7 J2.9 J2.11 R8.1 R10.1 R11.1 R19.1 R21.1 R22.1 R28.1 R30.1 R31.1 R34.2 SB1.2 SB2.2 SB3.2 T1.4 T2.4 T3.4 | length 2579.3
  Top Layer w20: v1(4165,3585) C4.1 ; v1(4165,3780) 4166.88,3778.12 4217.69,3778.12 C11.1 ; v1(4165,3970) 4166.25,3968.75 4218.32,3968.75 C7.1 ; v1(4165,4160) 4165.63,4159.37 4218.94,4159.37 C3.1 ; v1(4180,2685) 4180,2676.88 4190,2666.88 4190,2622.2 SB1.2@4190,2605 ; R11.1@4328.43,2685 v1(4395,2685) ; v1(4495,3585) C8.1 ; SB2.2@4600,2600 4601.91,2601.91 4601.91,2681.91 v1(4605,2685) ; R22.1@4754.43,2685 v1(4820,2685) ; v1(4805,3585) C12.1 ; v1(5035,2685) 5038.09,2681.91 5038.09,2618.14 5038.09,2601.91 SB3.2@5040,2600 ; R31.1@5180.43,2685 v1(5250,2685)
  Top Layer w31.5: R8.1 1620.43,3040.43 1675,3095 1675,3121.85 1674.78,3122.07 R10.1@1674.78,3429.78 ; v1(1613.31,3430) 1677.87,3430 R10.1@1678.09,3429.78 ; R19.1 2475.43,3040.43 2525,3090 2525,3126.85 2524.78,3127.07 2524.78,3434.78 2524.57,3435 v1(2460,3435) ; R28.1 3325.43,3040.43 3375,3090 3375,3126.85 3374.78,3127.07 R30.1@3374.78,3435 ; v1(3310,3435) R30.1 R30.1@3374.78,3434.78
BTN1: J1.31 P3.2 R33.1 | length 1711.6
  Top Layer w20: J1.31 5310,4060 5560.43,3809.57 R33.1 5560.43,3669.57 5610,3620 5610,3325 5690,3245 5845,3245 5967.53,3367.53 P3.2@5967.53,3707.47
CT1-S1: C2.2 J2.12 R9.2 | length 1166.6
  Top Layer w25: C2.2 4026.85,2783.15 4044.57,2765.43 R9.2@4044.57,2685
  Top Layer w31.5: J2.12 3440,2515 3975,2515 4044.57,2584.57 R9.2@4044.57,2685
CT2-S1: C6.2 J2.10 R20.2 | length 1192.3
  Top Layer w25: C6.2 4459.15,2775.85 4470.57,2764.43 R20.2 R20.2@4470.57,2685
  Top Layer w29.53: J2.10 3670,2380 3735,2445 4035,2445 4110,2520 4375,2520 4470.57,2615.57 R20.2@4470.57,2685
CT3-S1: C10.2 J2.8 R29.2 | length 1224.1
  Top Layer w25: C10.2 4876.85,2778.15 4896.57,2758.43 R29.2 R29.2@4896.57,2685
  Top Layer w29.53: J2.8 4070,2380 4150,2460 4745,2460 4896.57,2611.57 R29.2@4896.57,2685
DATA_A: J2.3 J2.5 R3.1 R12.2 U1.6 | length 1959.4
  Top Layer w20: J2.5 4670,2275 4690,2255 5070,2255 ; J2.3 5070,2255 ; U1.6@5727.44,2845 5765,2845 5790,2870 R3.1 ; 5070,2255 5508.68,2255 5905.87,2652.19 R12.2 5905.87,2749.13 5835,2820 R3.1 ; R3.1 5842.5,2870 5835,2877.5 R3.1
DATA_B: J2.2 J2.4 R12.1 R13.2 U1.7 | length 1838.1
  Top Layer w20: J2.4 4870,2410 4910,2450 5270,2450 ; J2.2 5270,2450 ; R12.1 5641,2685 5640,2686 ; R13.2@5835,3070 R13.2 5835,2975 5755,2895 U1.7 5675,2895 5640,2860 5640,2686 ; 5270,2450 5535,2450 5640,2555 5640,2686
ESP_BOOT: J1.25 P2.4 R27.1 | length 674.7
  Top Layer w20: J1.25 5240.25,3758.73 5240.25,3586.27 R27.1 R27.1@5243.26,3583.26
  Bottom Layer w20: v1(5240,3650) 5247.53,3642.47 5722.53,3642.47 P2.4
ESP_EN: J1.3 P2.5 R26.1 | length 1823
  Top Layer w20: R26.1 4292.34,4351.91 4343.09,4351.91 4385,4310 J1.3 4552.5,4312.5 4677.5,4312.5 v1(4680,4315)
  Bottom Layer w20: v1(4680,4315) 4680,4105 5050,3735 P2.5
GND: C13.2 C14.1 C15.1 J1.1 J1.15 J1.38 J1.GND@39 J1.GND@40 J1.GND@41 J1.GND@42 J1.GND@43 J1.GND@44 J1.GND@45 J1.GND@46 J1.GND@47 J2.1 P1.1 P2.1 P3.1 PS1.3 R13.1 R34.1 SW1.2 U1.5 U2.1 | length 2243.9
  Top Layer w20: v1(3535,3990) C15.1 3599.57,4054.57 3634.84,4089.84 U2.1 3634.84,4209.84 3713.15,4288.15 C13.2 3940.93,4289.07 4004.07,4289.07 v1(4005,4290) ; C14.1 v1(3920,3990) ; J1.1 v1(4625,4410) ; J1.15 4669.49,3769.49 4713.82,3813.82 4923.82,3813.82 v1(5005,3895) ; 4780.31,4106.06 4780.31,4050.94 4835.43,4050.94 4890.55,4050.94 4890.55,4106.06 ; v1(4812.48,4136.18) 4812.48,4122.48 4810,4120 4852.5,4120 ; J1.38 v1(5330,4410) ; v1(5715,2735) 5715,2793.39 5716.61,2795 U1.5 ; R13.1@5905.87,3070 5915.87,3060 v1(5975,3060)
  Top Layer w23.62: J2.1 5516.16,2345 5776,2604.84 v1(5776,2636)
  other v1: 4865,4080
LED1: D7.C J1.10 | length 5225.3
  Top Layer w20: J1.10@4554.45,3958.82 v1(4658.82,3958.82)
  Bottom Layer w20: D7.C 3365,1685 3415,1735 5530,1735 5670,1875 5670,2540 4980,3230 4980,3520 4658.82,3841.18 v1(4658.82,3958.82)
LED2: D8.C J1.11 | length 4855
  Top Layer w20: J1.11@4554.45,3908.82 v1(4726.18,3908.82)
  Bottom Layer w20: D8.C@3770,1450 D8.C 3770,1620 3840,1690 5570,1690 5710,1830 5710,2550 5020,3240 5020,3574 4726.18,3867.82 v1(4726.18,3908.82)
LED3: D9.C J1.12 | length 4505
  Top Layer w20: J1.12@4559.45,3858.82 v1(4798.82,3858.82)
  Bottom Layer w20: D9.C@4170,1450 D9.C 4170,1595 4225,1650 5605,1650 5750,1795 5750,2563.86 5065,3248.86 5065,3592.64 v1(4798.82,3858.82)
NetC1_2: C1.2 R8.2 T1.3 | length 1056.9
  Top Layer w31.5: R8.2 2069.57,2969.57 2175,3075 2175,3121.85 2174.07,3122.78 C1.2@2174.07,3436.52 ; C1.2@2176.46,3430 C1.2@2177.38,3429.07
NetC5_2: C5.2 R19.2 T2.3 | length 1074.5
  Top Layer w31.5: R19.2 2909.57,2969.57 3025,3085 3025,3126.85 3024.07,3127.78 C5.2@3024.07,3434.07 ; C5.2@3023.15,3435 C5.2@3024.07,3434.07 ; C5.2@3024.07,3435 C5.2@3024.07,3434.07
NetC9_2: C9.2 R28.2 T3.3 | length 1071.5
  Top Layer w31.5: R28.2 3764.57,2969.57 3875,3080 3875,3126.85 3874.07,3127.78 3874.07,3434.07 C9.2
NetD1_A: D1.A R35.2 | length 100
  Bottom Layer w20: R35.2 D1.A
NetD1_C: D1.C D2.A | length 1088.4
  Top Layer w31.5: D2.A 1900,2509.25 1900,2465 1970,2395 v1@1970,2195
  Bottom Layer w31.5: v1(1970,2190) 1970,1460 D1.C@1980,1450
NetD3_A: D3.A R36.2 | length 100
  Bottom Layer w20: R36.2 D3.A
NetD3_C: D3.C D4.A | length 1093
  Top Layer w31.5: D4.A 2300,2509.25 2300,2465 2375,2390 v1(2375,2190)
  Bottom Layer w31.5: D3.C 2372.5,1452.93 2372.5,2187.5 v1(2375,2190)
NetD5_A: D5.A R37.2 | length 100
  Bottom Layer w20: R37.2 D5.A
NetD5_C: D5.C D6.A | length 1071.8
  Top Layer w31.5: D6.A 2705,2509.25 2705,2460 2765,2400 v1@2765,2205
  Bottom Layer w20: v1(2765,2190) v1@2767.5,2187.5 ; D5.C@2767.5,1452.93 D5.C
  Bottom Layer w31.5: D5.C@2767.5,1452.93 v1@2767.5,2187.5
NetD7_A: D7.A R38.2 | length 95.8
  Bottom Layer w20: R38.2 3270.98,1380.55 3364.02,1380.55 D7.A
NetD8_A: D8.A R39.2 | length 100.8
  Bottom Layer w20: R39.2 3670.98,1380.55 3769.02,1380.55 D8.A
NetD9_A: D9.A R40.2 | length 100.8
  Bottom Layer w20: R40.2 4070.98,1380.55 4169.02,1380.55 D9.A
NetR7_2: R7.2 T1.1 | length 150.4
  Top Layer w29.53: R7.2 1525.54,2800.97 1674.46,2800.97 T1.1
NetR9_1: R9.1 SB1.1 | length 93.4
  Top Layer w20: R9.1@4115.43,2685 R9.1@4117.22,2685 ; R9.1 4117.22,2693.34 R9.1@4117.22,2685 ; SB1.1@4119,2605 4117.22,2606.78 4117.22,2620.58 R9.1@4117.22,2685
NetR18_2: R18.2 T2.1 | length 143.5
  Top Layer w31.5: 2381.51,2801.51 T2.1@2525,2801.51
NetR20_1: R20.1 SB2.1 | length 86.2
  Top Layer w20: R20.1 4541.43,2685 4541.43,2619.94 4541.43,2607.57 SB2.1@4544,2605
NetR25_2: R25.2 T3.1 | length 170.4
  Top Layer w31.5: R25.2 3205.54,2800.97 3374.46,2800.97 T3.1
NetR29_1: R29.1 SB3.1 | length 88.3
  Top Layer w20: SB3.1@4959.57,2600 4967.43,2607.87 4967.43,2615.74 R29.1@4967.43,2685
RX0: J1.34 P2.2 | length 1043.4
  Top Layer w20: J1.34 5320,4210 v1(5405,4125) ; v1(5575,3895) 5620,3850 5620,3660 5645,3635 5645,3490 5700,3435 P2.2
  Bottom Layer w20: v1(5405,4125) 5405,4065 v1(5575,3895)
RX2: J1.27 R6.1 U1.1 | length 1126.6
  Top Layer w20: J1.27 5310,3860 5365,3805 5365,3126.4 5391.68,3099.72 R6.1 5391.68,3003.32 5450,2945 U1.1 U1.1@5532.56,2945
SCL: J1.36 Q1.2 R14.1 | length 1075
  Top Layer w20: J1.36 5380,4310 ; R14.1@5484.57,4154.81 R14.1 5484.57,4205.43 5380,4310 ; Q1.2 5922.6,4437.4 5895,4465 5470,4465 5380,4375 5380,4310
SCL1: P1.4 Q1.3 R15.1 | length 375.6
  Top Layer w20: R15.1 5610,4350 5640,4380 P1.4 5835,4380 5860,4405 Q1.3@5908.27,4405
SDA: J1.33 Q2.2 R41.1 | length 819.8
  Top Layer w20: J1.33 5275,4160 5405,4030 5492.4,4030 ; R41.1 5484.57,4022.17 5492.4,4030 ; Q2.2@5919.42,4017.6 5825.22,4017.6 5807.62,4000 5615,4000 5585,4030 5492.4,4030
SDA1: P1.3 Q2.3 R42.1 | length 509.8
  Top Layer w20: P1.3 5843.43,4281.57 5870,4255 5995,4255 6020,4230 6020,4125 6011.73,4116.73 Q2.3
TX0: J1.35 P2.3 | length 1008.1
  Top Layer w20: J1.35 5345,4260 v1(5405,4200) ; v1(5640,3915) 5655,3900 5655,3725 5675,3705 5675,3560 5692.53,3542.47 5722.53,3542.47 P2.3
  Bottom Layer w20: v1(5405,4200) 5455,4150 5455,4100 v1(5640,3915)
TX2: J1.28 R4.1 U1.4 | length 1622.9
  Top Layer w20: J1.28 5335,3910 5405,3840 5405,3255 5650,3010 5650,2925 5595,2870 5595,2820 5570,2795 U1.4 5460,2795 5395.43,2730.43 5395.43,2688.75 R4.1
V1-L: J2.19 PS1.1 R7.1 R35.1 | length 4283.7
  Top Layer w29.53: R7.1 1525,2415 1595,2345 J2.19
  Bottom Layer w25: R35.1@1870,1450 R35.1 J2.19
  Bottom Layer w50: PS1.1@1676.93,4290 1465,4290 1330,4155 1330,2435 1420,2345 J2.19
V1-N: D2.C J2.18 PS1.2 T1.2 | length 2907.8
  Top Layer w29.53: J2.18@2075,2350 J2.18 2070,2509.25 D2.C 2069.25,2739.25 2131.51,2801.51 T1.2
  Bottom Layer w50: PS1.2 1526.46,3976.46 1435,3885 1435,2585 1530,2490 2000,2490 2070,2420 J2.18
V2-L: J2.17 R18.1 R36.1 | length 1432.5
  Top Layer w29.53: J2.17 2200,2415 2200,2685 2244.57,2729.57 R18.1
  Bottom Layer w29.53: R36.1@2270,1450 R36.1 J2.17
V2-N: D4.C J2.16 T2.2 | length 888.9
  Top Layer w31.5: J2.16 2470,2509.25 D4.C 2469.25,2564.25 2725,2820 3006.51,2820 T2.2@3025,2801.51
V3-L: J2.15 R25.1 R37.1 | length 1839.5
  Top Layer w31.5: J2.15 2670,2352.8 2605,2417.8 2605,2580 2685,2660 2889.13,2660 2889.57,2659.57 3169.57,2659.57 3205,2695 R25.1
  Bottom Layer w25: R37.1@2670,1450 R37.1 J2.15
V3-N: D6.C J2.14 T3.2 | length 1316.5
  Top Layer w31.5: J2.14@2874.84,2349.84 J2.14 2870,2505.75 D6.C 2950,2510 3000,2560 3340,2560 3513.15,2733.15 3843.15,2733.15 3875,2765 T3.2
WIFI_RST: J1.30 R32.1 SW1.1 | length 2475.4
  Top Layer w20: J1.30 5300,4010 5440,3870 5440,3665 5489.57,3615.43 R32.1 5489.57,3250.43 5570,3170 5975,3170 6030,3115 6030,2260 6006.42,2236.42 SW1.1@5915,2236.42
pads on no net: J1.13 J1.14 J1.16 J1.17 J1.18 J1.19 J1.20 J1.21 J1.22 J1.23 J1.24 J1.29 J1.32 J1.37 J2.6 J2.13 SW1.S1 SW1.S2 U2.4
copper on no net: | length 30430
  Top Layer w10: 4065,4490 4065,4710 1270,4710 1270,1310 1665,1310 1665,1330 5675,1330 5675,1310 6070,1310 6070,4710 5730,4710 5730,4490
  Bottom Layer w10: 4065,4490 4065,4710 1270,4710 1270,1310 1665,1310 1665,1330 5675,1330 5675,1310 6070,1310 6070,4710 5730,4710 5730,4490

## Polygon pours and split planes (outlines as drawn)
GND on Top Layer "GND_L01_P010" (solid, pour order 10): 4745,4200 4930,4200 4930,4015 4745,4015
no net on Top Layer "Top Layer-No Net 2" (solid, pour order 22): 5520,4055
no net on Top Layer "Top Layer-No Net" (solid, pour order 8): 3935,3630
no net on Top Layer "Top Layer-No Net 1" (solid, pour order 9): 4275,3435
GND on Bottom Layer "Bottom Layer-GND" (solid, pour order 18): 4590,2100 4590,2440 4690,2540 5235,2540 5275,2575 5305,2605 5305,2990 5045,3250 5045,3685 4475,3685 4410,3750 4410,3755 4410,4335 4055,4335 4055,4030 3665,3640 3215,3640 3215,4710 4065,4710 4065,4453 5730,4453 5730,4710 6070,4710 6070,2095.19
AGND on Bottom Layer "Bottom Layer-AGND" (solid, pour order 12): 1545,3330 3994,3330 3994,2490 3974,2470 3160,2470 3160,2100 4565,2100 4565,2455 4670,2560 5235,2560 5265,2585 5285,2605 5285,2952.52 5017.5,3232.52 5017.5,3530 4945,3585 4860,3660 4465,3660 4375,3750 4375,4300 4085,4300 4085,4025 3665,3605 1545,3605 1520,3580 1520,3355

## Other copper
Top Layer:
  region net DATA_B: 5668.5,2686 5643.5,2648 5643.5,2724
  region net DATA_A: 5030,2260
  region net DATA_A: 5070,2285 5040,2260 5100,2260
  region net SDA: 5520,4035
  region net SDA: 5485,4005 5516,4027 5455,4027
  region net DATA_B: 5270,2414 5306,2450 5235,2450
  region net ADC_V1: 1875,3462.5
  region net ADC_V1: 1875,3462.5 1902.31,3496 1846.31,3496
  region net ADC_V2: 2722,3472 2755,3500 2685,3500
  region net ADC_V2: 2945,3491
  region net ADC_V2: 2915,3473 2945,3500 2884,3500 2883,3501
  region net ADC_V3: 3572,3473 3597,3498 3546,3498 3545,3499
  region net ADC_V3: 3571,3481
  region net ADC_V3: 3602,3498
  region net ADC_V3: 3575,3480
Bottom Layer:
  region net +3V3: 3705,3510 3740,3535 3670,3535
  region net +3V3: 3650,3550
  region net +3V3: 3670,3570 3635,3545 3705,3545
  region net +3V3: 2815,3535
  region net +3V3: 2855,3510 2815,3535 2895,3535
  region net +5: 5715,3170 5745,3200 5685,3200

## Silkscreen, mask and mechanical layers (free items; w line width, h text height)
Top Overlay:
  drawing of 62 lines, arcs and shapes, not listed
  text "." at 3905,4145 h30
  text "SW2" at 5930,3870 h30
  text "+3v3" at 5820,3780 h30 r90
  text "EN" at 5820,3710 h30 r90
  text "BOOT" at 5820,3580 h30 r90
  text "TX" at 5830,3500 h30 r90
  text "." at 2880,3465 h30
  text "." at 3730,3465 h30
  text "." at 2033.31,3460 h30
  text "RX" at 5830,3405 h30 r90
  text "GND" at 5830,3285 h30 r90
  text "Energy Monitor v1.0" at 4085,3180 h60
  text "'.Print_Date'" at 4370,3075 h60
  text "." at 3990,2900 h30
  text "." at 4425,2900 h30
  text "." at 4840,2900 h30
  text "V1" at 1930,1475 h60
  text "V2" at 2320,1475 h60
  text "V3" at 2720,1475 h60
  text "CT1" at 3295,1475 h60
  text "CT2" at 3690,1475 h60
  text "CT3" at 4090,1475 h60
  text "RS485" at 4830,1475 h60
  text "L" at 1850,1365 h60
  text "N" at 2050,1365 h60
  text "L" at 2250,1365 h60
  text "N" at 2450,1365 h60
  text "L" at 2650,1365 h60
  text "N" at 2850,1365 h60
  text "NC" at 3020,1365 h60
  text "S1" at 3230,1365 h60
  text "S2" at 3420,1365 h60
  text "S1" at 3635,1365 h60
  text "S2" at 3825,1365 h60
  text "S1" at 4035,1365 h60
  text "S2" at 4225,1365 h60
  text "NC" at 4420,1365 h60
  text "A" at 4650,1365 h60
  text "B" at 4850,1365 h60
  text "A" at 5050,1365 h60
  text "B" at 5250,1365 h60
  text "GND" at 5390,1365 h60
Bottom Overlay:
  text "SCL" at 5845,4365 h30
  text "SDA" at 5850,4270 h30
  text "+5" at 5825,4170 h30
  text "GND" at 5760,4110 h30 r180
Mechanical 1:
  lines w10: 1198.31,1450 1405,1450 1405,1243.31 ; 1198.31,4575 1405,4575 1405,4781.69 ; 1665,1800 3668.94,1800 ; 1870,1557.6 1870,2345 ; 1970,1285 1970,2250 ; 2070,1557.6 2070,2345 ; 2270,1557.6 2270,2345 ; 2370,1285 2370,2250 ; 2470,1557.6 2470,2345 ; 2670,1557.6 2670,2345 ; 2770,1285 2770,2250 ; 2870,1557.6 2870,2345 ; 3070,1557.6 3070,2345 ; 3270,1557.6 3270,2345 ; 3365,1285 3365,2250 ; 3470,1557.6 3470,2345 ; 3670,1557.6 3670,2345 ; 3770,1285 3770,2250 ; 3870,1557.6 3870,2345 ; 4070,1557.6 4070,2345 ; 4170,1285 4170,2250 ; 4270,1557.6 4270,2345 ; 4470,1557.6 4470,2345 ; 4670,1557.6 4670,2345 ; 4870,1557.6 4870,2345 ; 4970,1285 4970,2250 ; 5070,1557.6 5070,2345 ; 5270,1557.6 5270,2345 ; 5470,1557.6 5470,2345 ; 5620,4084.72 5620,4085 ; 5840,4183.15 5840,4185 ; 5935,1243.31 5935,1450 6141.69,1450 ; 5935,4786.69 5935,4580 6141.69,4580

## Dimensions
2070,1557.6 to 1665,1330 on Mechanical 1
1405,1445 to 1405,4575 on Mechanical 1
1270,4710 to 6070,4710 on Mechanical 1
1200,4765 to 2145,3630 on Mechanical 1
1665,1800 to 3668.94,1800 on Mechanical 1
5935,1450 to 1405,1450 on Mechanical 1
5675,1330 to 1665,1330 on Mechanical 1
1200,1981.77 to 1200,4705 on Mechanical 1